# EAGLE board bk-cir6 (EAGLE 9.1.0)
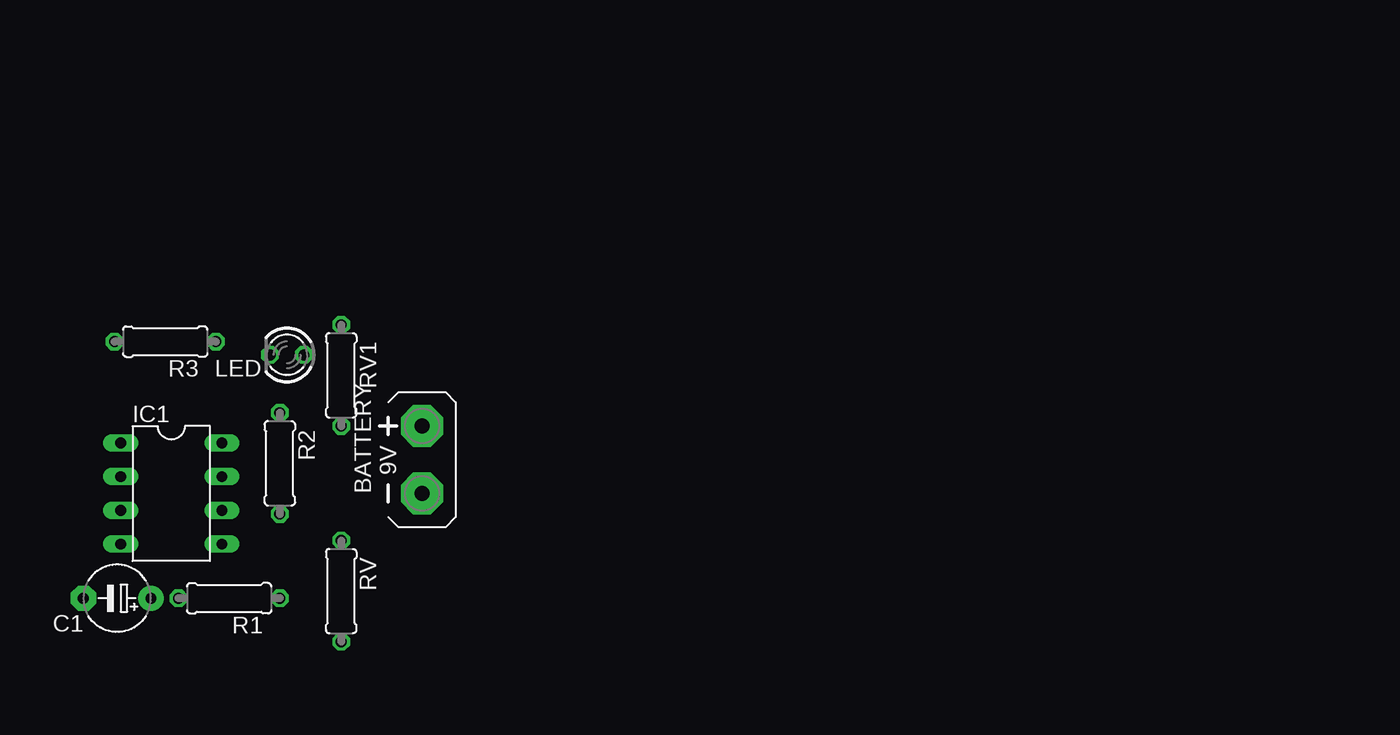
[diagram p0: board, top side]
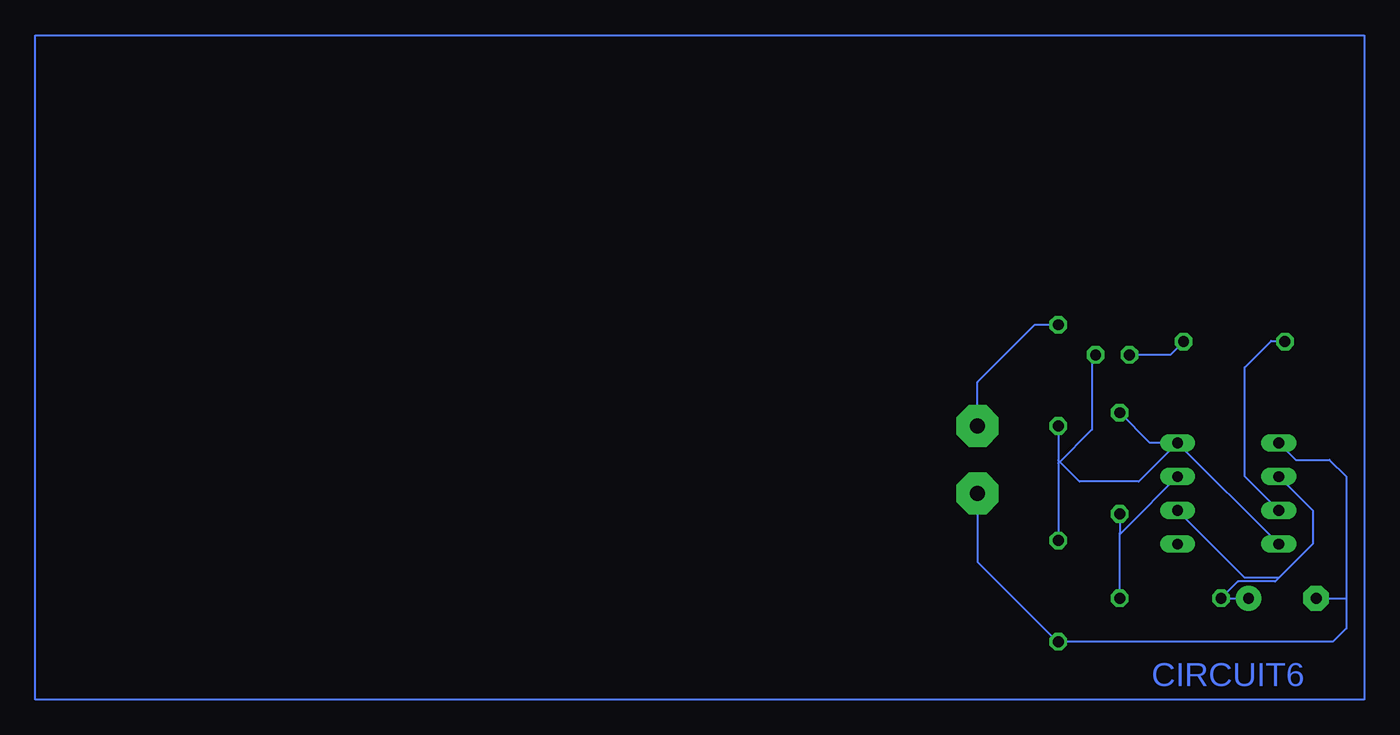
[diagram p1: board, bottom side, seen from below]

No outline drawn. Coordinates in mm, seen from the top.
Copper layers (1*16): Top 0.035mm / dielectric 1.5mm / Bottom 0.035mm
Design rules "default": minimum track width 6mil, minimum drill 0.35mm, track to track 6mil, track to pad 6mil, pad to pad 6mil, via to via 6mil, smd to smd 6mil, copper to edge 40mil, drill to drill 6mil, minimum pad ring 10mil, minimum via ring 8mil, stop-mask expansion 4mil, vias tented up to drill 0mil, thermal gap 10mil

## Footprints (pad centres in the part's own frame; a part is rotated, then mirrored left to right if it is on the bottom)
AB9V = drill 1.118 pad 3.15 octagon: + 0,2.54; - 0,-2.54
E5-5 = drill 0.813 pad 1.905: + -2.54,0 | drill 0.813 pad 1.905 octagon: - 2.54,0
DIL08 = drill 0.813 long: 1 -3.81,-3.81; 2 -1.27,-3.81; 3 1.27,-3.81; 4 3.81,-3.81; 5 3.81,3.81; 6 1.27,3.81; 7 -1.27,3.81; 8 -3.81,3.81
LED3MM = drill 0.813 octagon: A -1.27,0; K 1.27,0
0207/7 = drill 0.813 octagon: 1 -3.81,0; 2 3.81,0

## Placement (x,y rotation side)
BATTERY  [AB9V]  29.1,18.05 0 top
C1  [E5-5]  6.16,7.62 180 top
IC1  [DIL08]  10.24,15.51 270 top
LED  [LED3MM]  18.94,25.94 180 top
R1  [0207/7]  14.59,7.62 180 top
R2  [0207/7]  18.4,17.78 270 top
R3  [0207/7]  9.78,26.94 180 top
RV  4k  [0207/7]  23.02,8.16 270 top
RV1  4k  [0207/7]  23.02,24.4 270 top

## Library data of the parts
BATTERY = battery
C1 R1-R3 RV RV1 = resistor
IC1 = ic-package
LED = led

## Nets
S$1: IC1.7 R1.1 R2.2
S$2: IC1.3 R3.2
S$4: LED.K R3.1
S$5: BATTERY.+ RV1.1
S$6: BATTERY.- C1.- IC1.1 RV.2
S$7: C1.+ IC1.2 IC1.6 R1.2
S$9: IC1.4 IC1.8 LED.A R2.1 RV1.2 RV.1

## Tracks (layer width: path | path; a pad name or v marks a point on that pad's centre or on a via)
S$1
  Bottom 0.152: R2.2 18.4,12.51 18.36,12.47 | 18.36,12.47 18.4,12.43 R1.1 | IC1.7 17.86,12.97 18.36,12.47
S$2
  Bottom 0.152: IC1.3 9,16.81 9,25 7,27 6.03,27 R3.2
S$3
  Bottom 0.152: 0,0 100,0 100,50 0,50 0,0
S$4
  Bottom 0.152: R3.1 14.59,25.94 LED.K
S$5
  Bottom 0.152: BATTERY.+ 29.1,23.9 24.79,28.21 RV1.1
S$6
  Bottom 0.152: IC1.1 5.16,18.05 2.62,18.05 1.35,16.78 1.35,8.89 | 2.35,4.35 1.35,5.35 1.35,7.89 1.35,8.89 | BATTERY.- 29.1,10.35 23.06,4.31 RV.2 2.35,4.35 | 2.35,4.35 | 1.35,8.89 1.35,7.62 C1.-
S$7
  Bottom 0.152: IC1.2 3.89,14.24 3.89,11.7 6.43,9.16 | 6.43,9.16 8.97,9.16 IC1.6 | 6.43,9.16 6.7,8.89 9.51,8.89 R1.2 C1.+
S$9
  Bottom 0.152: IC1.4 IC1.8 | RV1.2 23.02,17.78 | RV.1 23.02,12 23.02,18 | IC1.8 16.13,19.32 R2.1 | 23.02,17.78 20.48,20.32 20.48,25.67 LED.A | IC1.8 16.97,16.4 21.42,16.4 23.02,18 | 23.02,18 23.02,17.78

## Text on the board
Bottom: CIRCUIT6